# EAGLE board sensor_vol_div_cap_eagle (EAGLE 7.5.0)
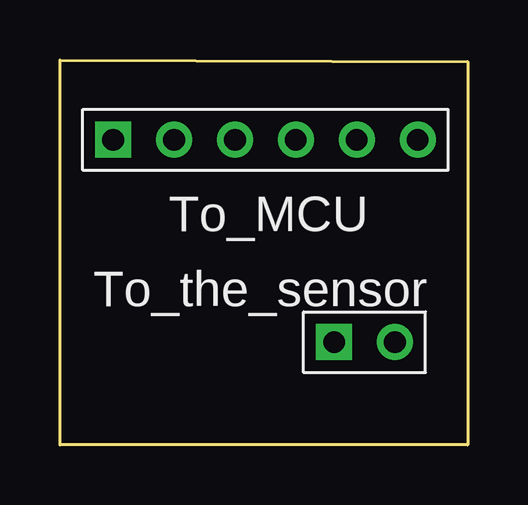
[diagram p0: board, top side]
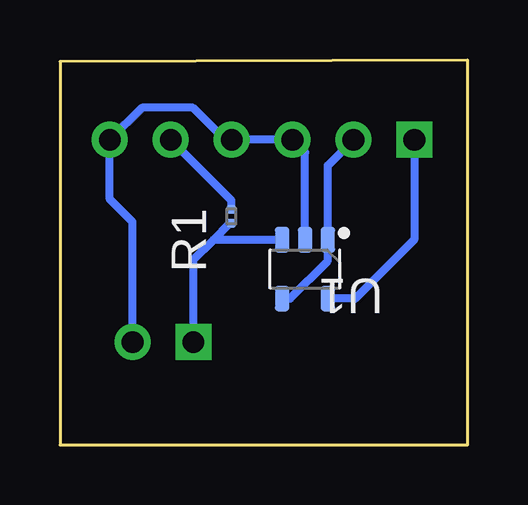
[diagram p1: board, bottom side, seen from below]

Size 17 x 16.06 mm. Coordinates in mm from the lower left corner, seen from the top.
Outline: 0,16.06 17,15.99 17,0 0,0 0,16.06
Copper layers (1*16): Top 0.035mm / dielectric 1.5mm / Bottom 0.035mm
Design rules "default *": minimum track width 10mil, minimum drill 0.61mm, track to track 8mil, track to pad 8mil, pad to pad 8mil, via to via 8mil, smd to smd 8mil, copper to edge 40mil, drill to drill 8mil, minimum pad ring 0mil, minimum via ring 8mil, stop-mask expansion 2mil, vias tented up to drill 19mil, thermal gap 10mil
Net classes: 0 Default: width 0.33 mm, clearance 0.33 mm

## Footprints (pad centres in the part's own frame; a part is rotated, then mirrored left to right if it is on the bottom)
RES_0603_M = smd 0.37 x 0.38: 1 -0.29,0; 2 0.29,0
HDR-1x6 = drill 0.9 pad 1.5 square: 1 -6.35,0 | drill 0.9 pad 1.5: 2 -3.81,0; 3 -1.27,0; 4 1.27,0; 5 3.81,0; 6 6.35,0
HDR-1x2 = drill 0.9 pad 1.5 square: 1 -1.27,0 | drill 0.9 pad 1.5: 2 1.27,0
SOT23-5P95_280X100L45X40N = smd 0.61 x 1.07: 1 -0.95,-1.225; 2 0,-1.225; 3 0.95,-1.225; 4 0.95,1.225; 5 -0.95,1.225

## Placement (x,y rotation side)
R1  1.78MOhm  [RES_0603_M]  9.85,9.54 270 bottom
To_MCU  HDR-1X6  [HDR-1x6]  8.57,12.73 0 top
To_the_sensor  HDR-1X2  [HDR-1x2]  12.7,4.29 0 top
U1  AD8615AUJZ-REEL  [SOT23-5P95_280X100L45X40N]  6.78,7.33 180 bottom

## Library data of the parts
R1 = common; UNIQUE_NAME: RES_0603_METRIC
To_MCU = common; UNIQUE_NAME: HDR-1x6
To_the_sensor = common; UNIQUE_NAME: HDR-1x2
U1 = common; DATASHEET: http://datasheets.diptrace.com/analog_devices/AD8615_8616_8618.pdf; MANUFACTURER: Analog Devices; PART_NUMBER_(DIGI-KEY): AD8615AUJZ-REELDKR-ND; UNIQUE_NAME: ANALOG_UJ-5

## Nets
Net_2: To_MCU.1 U1.5
Net_3: To_MCU.3 To_MCU.4 To_MCU.6 To_the_sensor.2 U1.2
OUT_Op_Amp1: To_MCU.2 U1.1 U1.4
Pulse_in: R1.1 To_MCU.5
SENSE_IN1: R1.2 To_the_sensor.1 U1.3

## Tracks (layer width: path | path; a pad name or v marks a point on that pad's centre or on a via)
Net_2
  Bottom 0.33: To_MCU.1 2.22,8.57 4.68,6.11 U1.5
Net_3
  Bottom 0.33: U1.2 6.78,12.21 To_MCU.3 To_MCU.4 10.11,12.73 11.45,14.07 13.58,14.07 To_MCU.6 14.92,10.25 13.97,9.3 To_the_sensor.2
OUT_Op_Amp1
  Bottom 0.33: To_MCU.2 5.83,11.66 U1.1 5.83,7.68 7.4,6.11 U1.4
Pulse_in
  Bottom 0.33: R1.1 9.85,10.2 To_MCU.5
SENSE_IN1
  Bottom 0.33: To_the_sensor.1 11.43,7.73 10.6,8.56 | 10.6,8.56 9.91,9.25 R1.2 | U1.3 10.6,8.56

## Text on the board
tPlace: To_MCU | To_the_sensor
bPlace: R1 | U1